# Altium PCB 2016_Matrice_LED.PcbDoc
Units mil, origin at the board's own origin, x right, y up, seen from the top; angles counter-clockwise.
Board outline 1259.84 x 1259.84 mil, 4 copper layers (1-TOP, 2-SIGNAL, 3-GND, 4-BOT), stack 68 mil thick; 10 components, 23 nets, 58 pads, 30 vias.
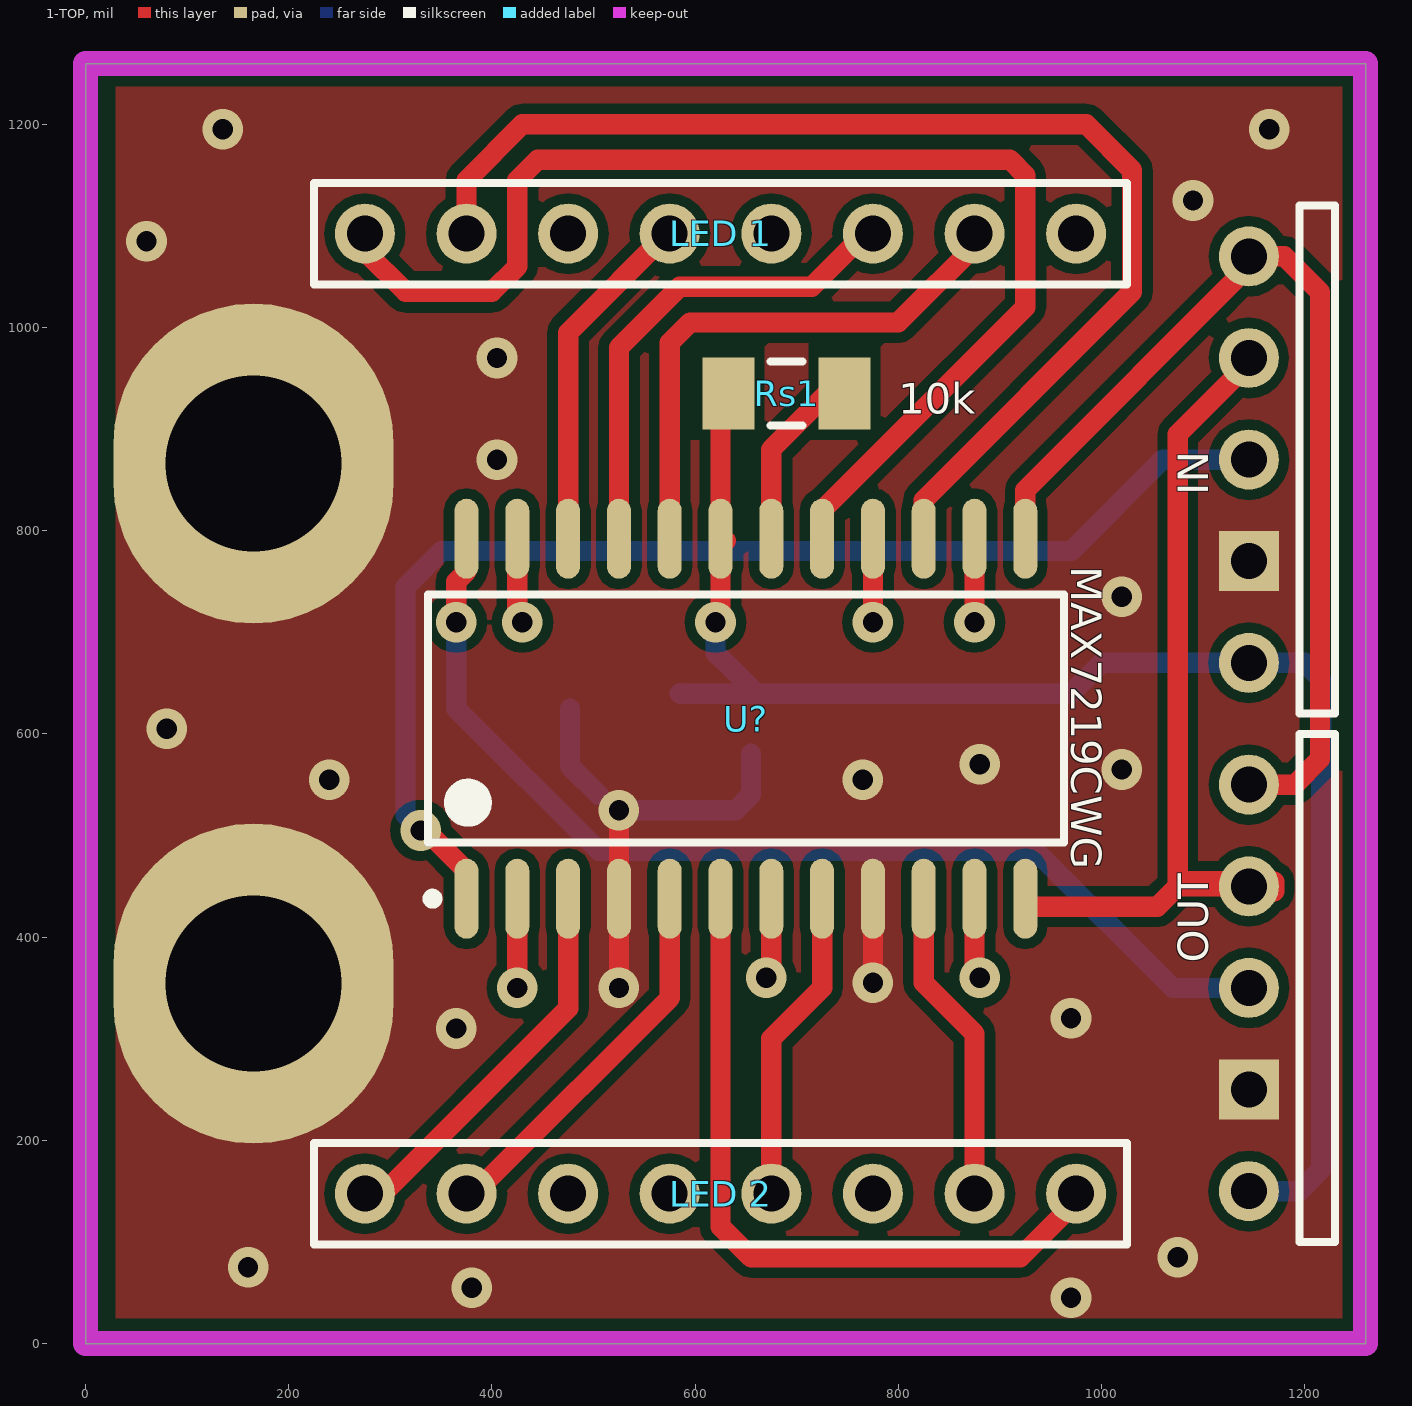
[diagram p0: 1-TOP view]
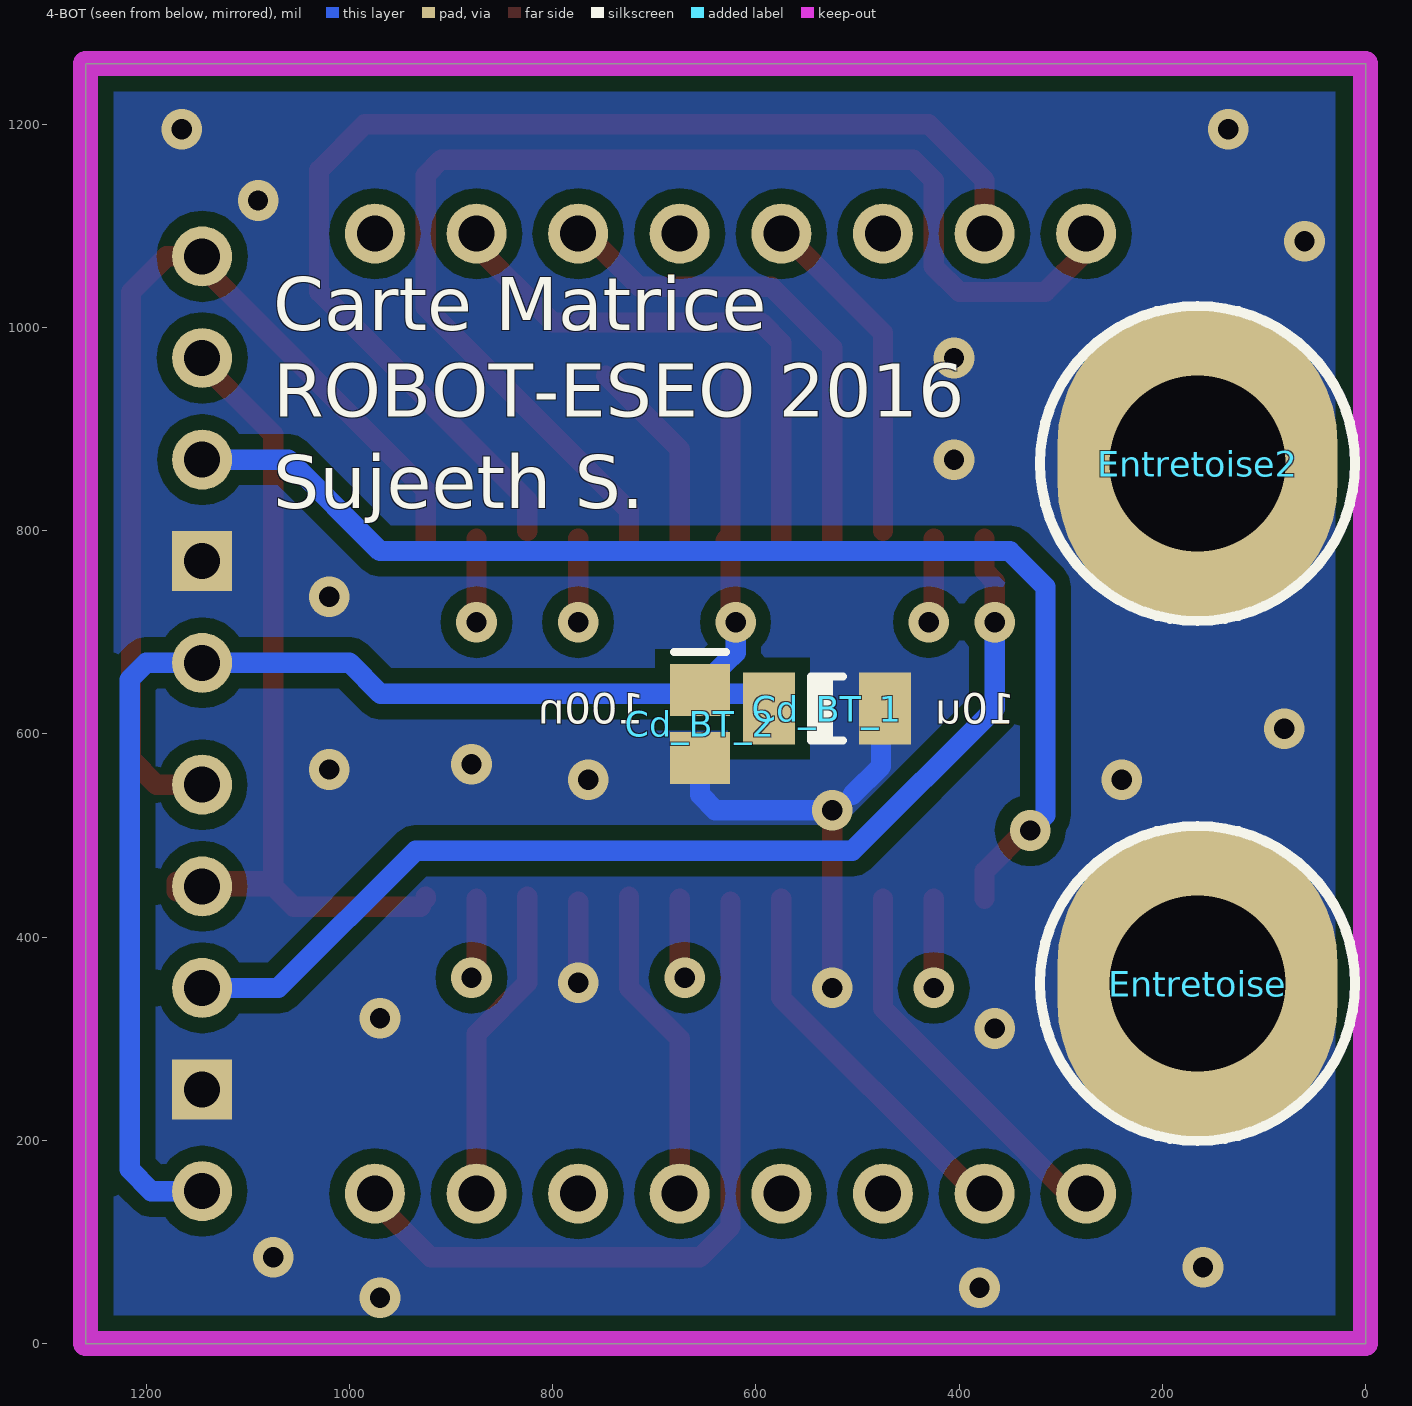
[diagram p1: 4-BOT view, seen from below]
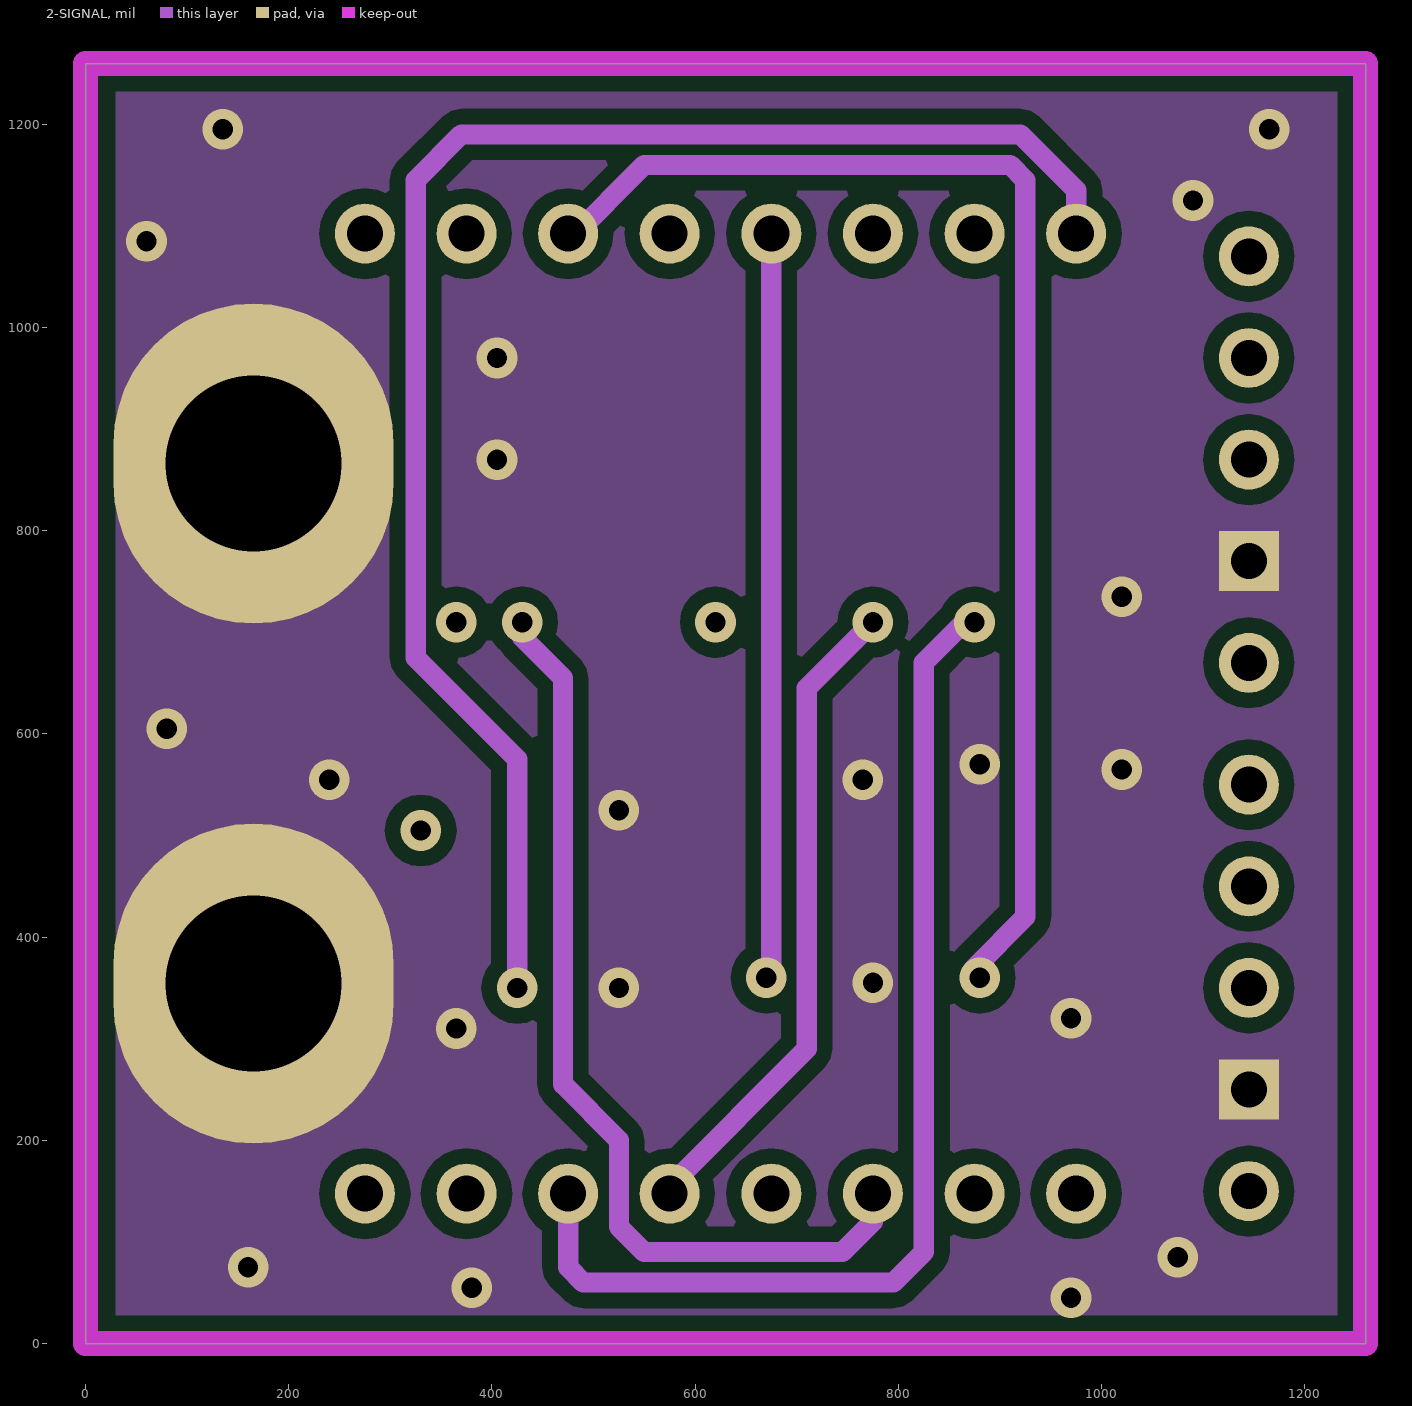
[diagram p2: 2-SIGNAL]
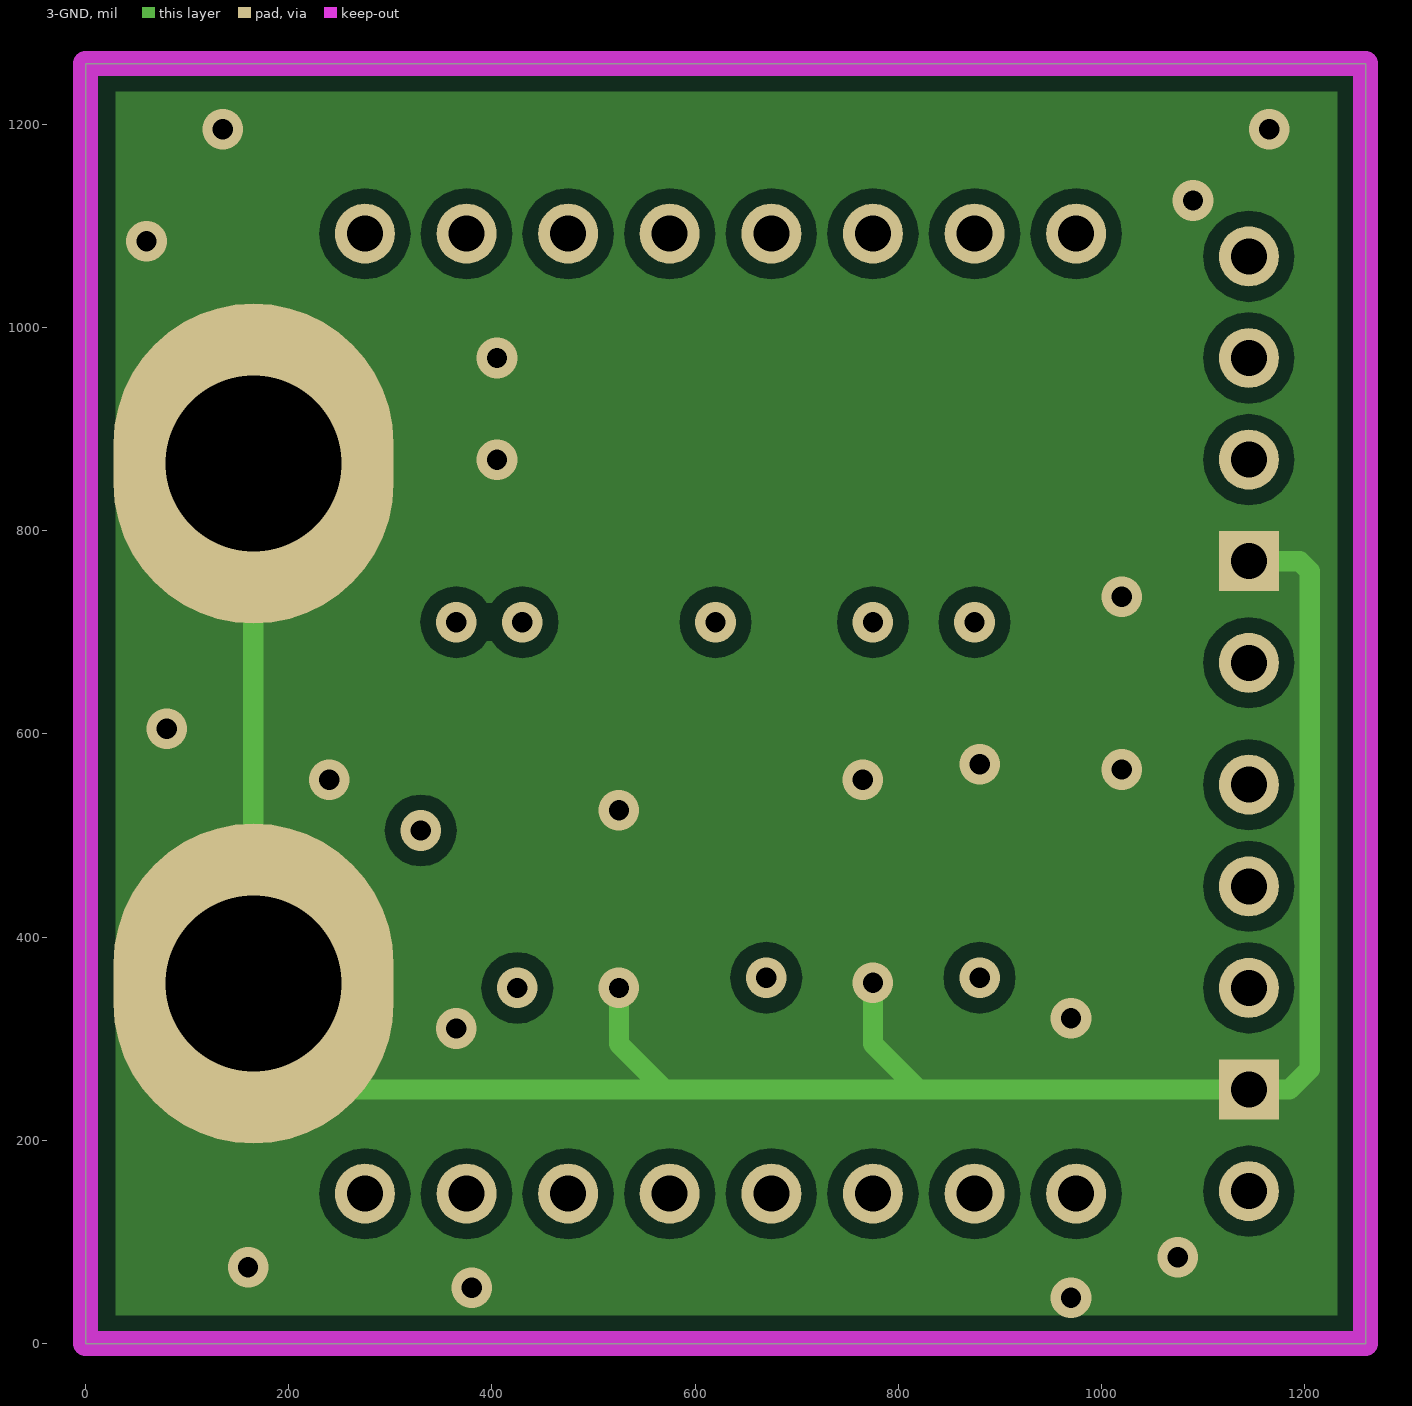
[diagram p3: 3-GND]

## Layer stack, top to bottom
Top Solder: solder mask 0.4, Solder Resist, Dk 3.5
1-TOP: signal copper 1.4
Dielectric1: core 20.8, FR-4, Dk 4.8
2-SIGNAL: signal copper 1.4
Dielectric2: prepreg 20.8, FR-4, Dk 4.8
3-GND: signal copper 1.4
Dielectric3: core 20.8, FR-4, Dk 4.8
4-BOT: signal copper 1.4
Bottom Solder: solder mask 0.4, Solder Resist, Dk 3.5

## Board outline
0,0 0,1259.84 1259.84,1259.84 1259.84,0

## Design rules (kind name [scope] priority, off if disabled: settings)
Clearance Clearance_4 [InNamedPolygon('GND_TOP') Or  InNamedPolygon('3-GND') Or  InNamedPolygon('2-GND') Or  InNamedPolygon('4-GND')] p1: gap=15
Clearance Clearance_3 [InNamedPolygon('4-GND') Or  InNamedPolygon('GND_TOP') Or  InNamedPolygon('2-GND') Or  InNamedPolygon('3-GND')] p2: gap=10
Clearance Clearance_2 [InNamedPolygon('4-GND') Or  InNamedPolygon('2-GND') Or  InNamedPolygon('3-GND') Or  InNamedPolygon('1-GND') Or  InNamedPolygon('2-GND24')] p3: gap=10
Clearance Clearance_1 [InNamedPolygon('2-GND') Or  InNamedPolygon('3-GND') Or  InNamedPolygon('1-GND') Or  InNamedPolygon('4-GND')] p4: gap=10
Clearance [All] p5: gap=7
FabricationTestpoint [(IsPad And (OnTopLayer Or OnBottomLayer))] p1: side=3 testpointundercomponent=TRUE minsize=40 maxsize=100 preferedsize=60 minholesize=0 maxholesize=40 preferedholesize=32 testpointgrid=1 allowsidetop=TRUE allowsidebottom=TRUE usegrid=TRUE gridtolerance=0.01
HoleSize [All] p1: absolutevalues=TRUE maxlimit=200 minlimit=1 maxpercent=80.000 minpercent=20.000
PlaneConnect [All] p1: planeconnectstyle=Direct reliefexpansion=20 reliefentries=4 reliefconductorwidth=10 reliefairgap=10
PolygonConnect [All] p1: connectstyle=Direct reliefconductorwidth=10 reliefentries=4 polygonreliefangle="90 Angle" airgapwidth=10
RoomDefinition 2016_Matrice_LED [InComponentClass('2016_Matrice_LED')] p1: confinementstyle=ConfineIn formatcopy=TRUE lockcomponents=FALSE outline 3375,-2391.14 2704.92,-2391.14 2704.92,-1715 3375,-1715
RoutingVias [All] p1: holewidth=7.87 width=7.87 viastyle="Through Hole" minholewidth=7.87 minwidth=7.87 maxholewidth=7.87 maxwidth=7.87
SilkToSolderMaskClearance SilkscreenOverComponentPads [IsPad] p1: minsilkscreentomaskgap=10 clearancetoexposedcopper=TRUE
SolderMaskExpansion [All] p1: expansion=4
Width [All] p1: maxlimit=200 minlimit=7 preferedwidth=16
25 further rules are at their usual default settings.

## Components (designator, comment, footprint, x,y, rotation, side; value= is the part's Value field where it differs from the comment)
Cd_BT_1 "10uF" C1206_N 530,625 r180 bottom
Cd_BT_2 "100nF" C0805_N 655,610 r270 bottom
Entretoise "Entretoise WURTH CMS" ENTRETOISE_CMS 165.35,354.33 r90 bottom
Entretoise2 "Entretoise WURTH CMS" ENTRETOISE_CMS 165.35,866.14 r90 bottom
IN "Header 5H" HDR1X5H 1145,670 r90 top
"LED 1" "Header 8" HDR1X8 275,1092.36 r0 top
"LED 2" "Header 8" HDR1X8 275,147.48 r0 top
OUT "Header 5H" HDR1X5H 1145,150 r90 top
Rs1 "10k" R1206_N 690,935 r180 top
U? "MAX7219CWG" WSO24_L 650,615 r90 top

## Footprints (in the part's own frame and the unit in brackets; to place one, negate y for a bottom-side part, rotate by r counter-clockwise, add the part's x,y. Pads: shape width x height; smd on the part's side, far side on the other; paste and mask are expansions set on the pad)
C0805_N [mm] "Chip Capacitor, Body 2.0x1.3mm, IPC Medium Density"
  rect 1.3x1.5 smd: 1(-0.85,0) 2(0.85,0)
  silkscreen extent -1.8,-0.65 -1.8,0.65, body extent -0.99,-0.63 1.01,0.63, height 0.8
C1206_N [mm] "Chip Capacitor, Body 3.2x1.6mm, IPC Medium Density"
  rect 1.3x1.8 smd: 1(-1.45,0) 2(1.45,0)
  silkscreen extent -0.4,-0.8 0.4,0.8, body extent -1.57,-0.81 1.63,0.79, height 1.02
ENTRETOISE_CMS [mm] "Entretoise CMS Wurth trou 4.4mm"
  oval 8x7 hole 4.4: 1(0,0)
  silkscreen extent -3.94,-3.94 3.94,3.94, body extent -2.99,-3 2.99,2.98, height 3
HDR1X5H [mm] "Connector; Header; 5 Position; Right Angle"
  round 1.5 hole 0.9: 1(0,0) 3(5.08,0) 4(7.62,0) 5(10.16,0)
  rect 1.5x1.5 hole 0.9: 2(2.54,0)
  silkscreen extent -1.27,-2.16 11.43,-1.27
HDR1X8 [mm] "Connector; Header; 8 Position"
  round 1.5 hole 0.9: 1(0,0) 2(2.54,0) 3(5.08,0) 4(7.62,0) 5(10.16,0) 6(12.7,0) 7(15.24,0) 8(17.78,0)
  silkscreen extent -1.27,-1.27 19.05,1.27
R1206_N [mm] "Chip Resistor, Body 3.2x1.6mm, IPC Medium Density"
  rect 1.3x1.8 smd: 1(-1.45,0) 2(1.45,0)
  silkscreen extent -0.4,-0.8 0.4,0.8, body extent -1.68,-0.87 1.68,0.87, height 0.71
WSO24_L [mm] "SOIC, 24-Leads, Body 15.4x7.5mm, Pitch 1.27mm, IPC High Density"
  oval 2x0.6 smd: 1(-4.5,6.985) 2(-4.5,5.715) 3(-4.5,4.445) 4(-4.5,3.175) 5(-4.5,1.905) 6(-4.5,0.635) 7(-4.5,-0.635) 8(-4.5,-1.905) 9(-4.5,-3.175) 10(-4.5,-4.445) 11(-4.5,-5.715) 12(-4.5,-6.985) 13(4.5,-6.985) 14(4.5,-5.715) 15(4.5,-4.445) 16(4.5,-3.175) 17(4.5,-1.905) 18(4.5,-0.635) 19(4.5,0.635) 20(4.5,1.905) 21(4.5,3.175) 22(4.5,4.445) 23(4.5,5.715) 24(4.5,6.985)
  silkscreen extent -4.62,-7.95 3.1,7.96, body extent -3.8,-7.8 3.8,7.8, height 2.65

## Part data
Cd_BT_1 Cd_BT_2: library part Condensateur, "Capacitor"
Entretoise Entretoise2: "Entretoise Wurth"
IN OUT: "Header, 5-Pin, Right Angle"
"LED 1" "LED 2": "Header, 8-Pin"
Rs1: library part Resistor, "Resistor"
U?: "Serially Interfaced, 8-Digit LED Display Driver"

## Via types
v1: diameter 40, hole 20, 1-TOP to 4-BOT, 30 vias

## Nets (pads, with @x,y where several pads share a name; then routed paths per layer and width w, separated by ;. In a path a pad name is that pad's centre, name@x,y a point inside that pad or via, vN(x,y) a via of type N, cw(c..) or ccw(c..) an arc to the next point about the centre after c; other vN are vias at no path point)
CLK: IN.5 OUT.5 U?.13 | length 988.1
  1-TOP w20: U?.13@925,790 U?.13 925,840 1150,1065 IN.5@1150,1075 ; IN.5@1150,1070 1180,1070 1215,1035 1215,575 1190,550 OUT.5@1155,550
CS: IN.4 OUT.4 U?.12 | length 876
  1-TOP w20: U?.12 U?.12@925,440 ; U?.12@930,430 1055,430 1075,450 ; IN.4@1145,975 1145,965 1075,895 1075,450 ; OUT.4@1150,450 1075,450 ; OUT.4@1150,455 1080,455 1075,450 ; IN.4@1155,970 IN.4@1155,975 ; OUT.4@1170,445 OUT.4@1170,454.51
DIN: IN.3 U?.1 | length 1218.8
  1-TOP w20: v1@335,505 375,465 U?.1
  4-BOT w20: v1(330,505) 315,520 315,745 350,780 970,780 1060,870 IN.3 IN.3@1140,875
DOUT: OUT.3 U?.24 | length 1065.2
  1-TOP w20: v1(365,710) 365,750 375,760 U?.24
  4-BOT w20: v1(365,710) 365,625 505,485 935,485 1070,350 OUT.3
GND: Cd_BT_1.2 Cd_BT_2.2 Entretoise2.1 Entretoise.1 IN.2 OUT.2 U?.4 U?.9 | length 2969.6
  1-TOP w20: 525,370 U?.4 v1(525,525) ; v1(775,355) U?.9@775,435 ; IN.2@1145,760 IN.2
  3-GND w20: Entretoise2.1@165,880 165,290 205,250 570,250 ; v1(525,350) 525,295 570,250 ; v1(775,355) 775,295 820,250 ; IN.2 1195,770 1205,760 1205,270 1185,250 OUT.2 820,250 ; 570,250 820,250
  4-BOT w20: Cd_BT_1.2@476.85,625 476.85,568.15 505,540 ; v1(525,525) 640,525 655,540 Cd_BT_2.2@655,580.47
  other v1: 970,45 380,55 160,75 1075,85 365,310 970,320 240,555 765,555 1020,565 880,570 80,605 1020,735 405,870 405,970 60,1085 1090,1125 135,1195 1165,1195
"MAT 1": "LED 1.1" U?.17 | length 1221.4
  1-TOP w20: 275,1075 315,1035 400,1035 425,1060 425,1145 445,1165 910,1165 925,1150 925,1020 725,820 U?.17@725,795 ; U?.17@725,785 U?.17
"MAT 2": "LED 1.2" U?.15 | length 1161.3
  1-TOP w20: 375,1120 375,1145 430,1200 985,1200 1030,1155 1030,1035 825,830 U?.15@825,800
"MAT 3": "LED 1.3" U?.11 | length 1357.3
  1-TOP w20: v1@875,360 U?.11
  2-SIGNAL w20: 477.5,1087.5 550,1160 910,1160 925,1145 925,420 v1@875,370
  other v1: 880,360
"MAT 4": "LED 1.4" U?.22 | length 336.4
  1-TOP w20: U?.22@475,800 475,995 575,1095
"MAT 5": "LED 1.5" U?.7 | length 804.9
  1-TOP w20: v1(670,360) 675,365 U?.7
  2-SIGNAL w20: v1@675,365 675,1090
"MAT 6": "LED 1.6" U?.21 | length 489.7
  1-TOP w20: U?.21@525,790 U?.21 525,980 585,1040 715,1040 775,1100
"MAT 7": "LED 1.7" U?.20 | length 546.4
  1-TOP w20: U?.20@575,785 U?.20 575,985 595,1005 800,1005 880,1085
"MAT 8": "LED 1.8" U?.2 | length 1650.7
  1-TOP w20: v1@425,355 U?.2
  2-SIGNAL w20: v1(425,350) 425,575 325,675 325,1027.5 325,1145 370,1190 920,1190 975,1135 975,1095
"MAT 11": "LED 2.1" U?.3 | length 365.9
  1-TOP w20: 292.5,147.5 475,330 U?.3
"MAT 22": "LED 2.2" U?.5 | length 348.9
  1-TOP w20: 397.5,162.5 575,340 U?.5
"MAT 33": "LED 2.3" U?.14 | length 1139.4
  1-TOP w20: v1(875,710) U?.14
  2-SIGNAL w20: 475,120 475,75 490,60 795,60 825,90 825,670 v1@870,715
"MAT 44": "LED 2.4" U?.16 | length 710
  1-TOP w20: v1@775,720 U?.16
  2-SIGNAL w20: 575,155 710,290 710,645 v1(775,710)
"MAT 55": "LED 2.5" U?.8 | length 315.7
  1-TOP w20: 675,145 675,300 725,350 U?.8 U?.8@725,440
"MAT 66": "LED 2.6" U?.23 | length 984.3
  1-TOP w20: v1@425,715 U?.23
  2-SIGNAL w20: v1(430,710) 430,695 470,655 470,255 525,200 525,115 550,90 745,90 775,120
"MAT 77": "LED 2.7" U?.10 | length 320.7
  1-TOP w20: U?.10@825,440 U?.10 825,355 875,305 875,140
"MAT 88": "LED 2.8" U?.6 | length 701.7
  1-TOP w20: U?.6@625,435 625,115 655,85 920,85 972.5,137.5
NetRs1_1: Rs1.1 U?.18 | length 190.4
  1-TOP w20: U?.18 675,880 Rs1.1@747.5,952.5
VCC: Cd_BT_1.1 Cd_BT_2.1 IN.1 OUT.1 Rs1.2 U?.19 | length 1537.8
  1-TOP w20: v1@625,725 U?.19 U?.19@625,795 ; Rs1.2@625,950 U?.19@625,795 ; U?.19@630,790 U?.19@625,795
  4-BOT w20: Cd_BT_1.1@585,640 585.47,639.53 655,639.53 969.53,639.53 1000,670 IN.1 1200,670 1216.37,653.63 1216.37,171.37 1195,150 OUT.1 ; v1@620,715 620,680 630.12,669.88 650.35,649.65 Cd_BT_2.1@660.47,639.53
  other v1: 620,710

## Polygon pours and split planes (outlines as drawn)
GND on 1-TOP "1-GND" (solid, pour order 8): 30,1270 1275,1270 1275,25 30,25
GND on 2-SIGNAL "2-GND" (solid, pour order 7): 30,1270 1275,1270 1275,25 30,25
GND on 3-GND "3-GND" (solid, pour order 6): 30,1270 1275,1270 1275,25 30,25
GND on 4-BOT "4-GND" (solid, pour order 5): 30,1270 1275,1270 1275,25 30,25

## Keep-outs
Keep-Out Layer:
  the board outline again, w25

## Silkscreen, mask and mechanical layers (free items; w line width, h text height)
Top Overlay:
  text "10k" at 800,915 h30
  text "MAX7219CWG" at 970,765 h30 r270
Bottom Overlay:
  text "Carte Matrice" at 1075,980 h90
  text "ROBOT-ESEO 2016" at 1075,895 h90
  text "Sujeeth S." at 1075,805 h90
  text "10u" at 345,610 h30
  text "100n" at 710,610 h30